# EAGLE board CT_schematic (EAGLE 7.6.0)

Size 100 x 80 mm. Coordinates in mm from the lower left corner, seen from the top.
Outline: 0,0 100,0 100,80 0,80 0,0
Copper layers (1*16): Top 0.035mm / dielectric 1.5mm / Bottom 0.035mm
Design rules "default": minimum track width 10mil, minimum drill 24mil, track to track 8mil, track to pad 8mil, pad to pad 8mil, via to via 8mil, smd to smd 8mil, copper to edge 40mil, drill to drill 8mil, minimum pad ring 10mil, minimum via ring 8mil, stop-mask expansion 4mil, vias tented up to drill 0mil, thermal gap 10mil

## Footprints (pad centres in the part's own frame; a part is rotated, then mirrored left to right if it is on the bottom)
C0603 = smd 0.8 x 0.8: 1 -0.762,0; 2 0.762,0
C0402 = smd 0.5 x 0.5: 1 -0.508,0; 2 0.508,0
C1210 = smd 1.2 x 2.5: 1 -1.524,0; 2 1.524,0
EXV-9H = smd 3.505 x 1.676: 1 -2.857,0; 2 2.857,0
L0603 = smd 0.8 x 0.8: 1 -0.762,0; 2 0.762,0
PJ-037B_PACKAGE = drill 3.7 square: 1 12,0 | drill 3.2 square: 2 6,0
R0603 = smd 0.8 x 0.8: 1 -0.762,0; 2 0.762,0
LQFP176 = smd 0.3 x 1.2: 1 -10.75,-12.75; 2 -10.25,-12.75; 3 -9.75,-12.75; 4 -9.25,-12.75; 5 -8.75,-12.75; 6 -8.25,-12.75; 7 -7.75,-12.75; 8 -7.25,-12.75; 9 -6.75,-12.75; 10 -6.25,-12.75; 11 -5.75,-12.75; 12 -5.25,-12.75; 13 -4.75,-12.75; 14 -4.25,-12.75; 15 -3.75,-12.75; 16 -3.25,-12.75; 17 -2.75,-12.75; 18 -2.25,-12.75; 19 -1.75,-12.75; 20 -1.25,-12.75; 21 -0.75,-12.75; 22 -0.25,-12.75; 23 0.25,-12.75; 24 0.75,-12.75; 25 1.25,-12.75; 26 1.75,-12.75; 27 2.25,-12.75; 28 2.75,-12.75; 29 3.25,-12.75; 30 3.75,-12.75; 31 4.25,-12.75; 32 4.75,-12.75; 33 5.25,-12.75; 34 5.75,-12.75; 35 6.25,-12.75; 36 6.75,-12.75; 37 7.25,-12.75; 38 7.75,-12.75; 39 8.25,-12.75; 40 8.75,-12.75; 41 9.25,-12.75; 42 9.75,-12.75; 43 10.25,-12.75; 44 10.75,-12.75; 89 10.75,12.75; 90 10.25,12.75; 91 9.75,12.75; 92 9.25,12.75; 93 8.75,12.75; 94 8.25,12.75; 95 7.75,12.75; 96 7.25,12.75; 97 6.75,12.75; 98 6.25,12.75; 99 5.75,12.75; 100 5.25,12.75; 101 4.75,12.75; 102 4.25,12.75; 103 3.75,12.75; 104 3.25,12.75; 105 2.75,12.75; 106 2.25,12.75; 107 1.75,12.75; 108 1.25,12.75; 109 0.75,12.75; 110 0.25,12.75; 111 -0.25,12.75; 112 -0.75,12.75; 113 -1.25,12.75; 114 -1.75,12.75; 115 -2.25,12.75; 116 -2.75,12.75; 117 -3.25,12.75; 118 -3.75,12.75; 119 -4.25,12.75; 120 -4.75,12.75; 121 -5.25,12.75; 122 -5.75,12.75; 123 -6.25,12.75; 124 -6.75,12.75; 125 -7.25,12.75; 126 -7.75,12.75; 127 -8.25,12.75; 128 -8.75,12.75; 129 -9.25,12.75; 130 -9.75,12.75; 131 -10.25,12.75; 132 -10.75,12.75 | smd 1.2 x 0.3: 45 12.75,-10.75; 46 12.75,-10.25; 47 12.75,-9.75; 48 12.75,-9.25; 49 12.75,-8.75; 50 12.75,-8.25; 51 12.75,-7.75; 52 12.75,-7.25; 53 12.75,-6.75; 54 12.75,-6.25; 55 12.75,-5.75; 56 12.75,-5.25; 57 12.75,-4.75; 58 12.75,-4.25; 59 12.75,-3.75; 60 12.75,-3.25; 61 12.75,-2.75; 62 12.75,-2.25; 63 12.75,-1.75; 64 12.75,-1.25; 65 12.75,-0.75; 66 12.75,-0.25; 67 12.75,0.25; 68 12.75,0.75; 69 12.75,1.25; 70 12.75,1.75; 71 12.75,2.25; 72 12.75,2.75; 73 12.75,3.25; 74 12.75,3.75; 75 12.75,4.25; 76 12.75,4.75; 77 12.75,5.25; 78 12.75,5.75; 79 12.75,6.25; 80 12.75,6.75; 81 12.75,7.25; 82 12.75,7.75; 83 12.75,8.25; 84 12.75,8.75; 85 12.75,9.25; 86 12.75,9.75; 87 12.75,10.25; 88 12.75,10.75; 133 -12.75,10.75; 134 -12.75,10.25; 135 -12.75,9.75; 136 -12.75,9.25; 137 -12.75,8.75; 138 -12.75,8.25; 139 -12.75,7.75; 140 -12.75,7.25; 141 -12.75,6.75; 142 -12.75,6.25; 143 -12.75,5.75; 144 -12.75,5.25; 145 -12.75,4.75; 146 -12.75,4.25; 147 -12.75,3.75; 148 -12.75,3.25; 149 -12.75,2.75; 150 -12.75,2.25; 151 -12.75,1.75; 152 -12.75,1.25; 153 -12.75,0.75; 154 -12.75,0.25; 155 -12.75,-0.25; 156 -12.75,-0.75; 157 -12.75,-1.25; 158 -12.75,-1.75; 159 -12.75,-2.25; 160 -12.75,-2.75; 161 -12.75,-3.25; 162 -12.75,-3.75; 163 -12.75,-4.25; 164 -12.75,-4.75; 165 -12.75,-5.25; 166 -12.75,-5.75; 167 -12.75,-6.25; 168 -12.75,-6.75; 169 -12.75,-7.25; 170 -12.75,-7.75; 171 -12.75,-8.25; 172 -12.75,-8.75; 173 -12.75,-9.25; 174 -12.75,-9.75; 175 -12.75,-10.25; 176 -12.75,-10.75
ARDUCAM = drill 1 pad 1.8 square: 1 0,0 | drill 1 pad 1.8: 2 0,2.54; 3 2.54,0; 4 2.54,2.54; 5 5.08,0; 6 5.08,2.54; 7 7.62,0; 8 7.62,2.54; 9 10.16,0; 10 10.16,2.54; 11 12.7,0; 12 12.7,2.54; 13 15.24,0; 14 15.24,2.54; 15 17.78,0; 16 17.78,2.54; 17 20.32,0; 18 20.32,2.54; 19 22.86,0; 20 22.86,2.54
AT24C02D = smd 1.6 x 0.6: 1 -2.475,1.905 | smd 1.55 x 0.6: 2 -2.475,0.635; 3 -2.475,-0.635; 4 -2.475,-1.905; 5 2.475,-1.905; 6 2.475,-0.635; 7 2.475,0.635; 8 2.475,1.905
TDFN-8/6MM = smd 0.3 x 0.75: 1 0,0; 2 0.5,0; 3 1,0; 4 1.5,0; 5 1.5,3; 6 1,3; 7 0.5,3; 8 0,3
PC28F512P33BFD = smd 0.45 x 0.45: A1 0,0; A2 1,0; A3 2,0; A4 3,0; A5 4,0; A6 5,0; A7 6,0; A8 7,0; B1 0,-1; B2 1,-1; B3 2,-1; B4 3,-1; B5 4,-1; B6 5,-1; B7 6,-1; B8 7,-1; C1 0,-2; C2 1,-2; C3 2,-2; C4 3,-2; C5 4,-2; C6 5,-2; C7 6,-2; C8 7,-2; D1 0,-3; D2 1,-3; D3 2,-3; D4 3,-3; D5 4,-3; D6 5,-3; D7 6,-3; D8 7,-3; E1 0,-4; E2 1,-4; E3 2,-4; E4 3,-4; E5 4,-4; E6 5,-4; E7 6,-4; E8 7,-4; F1 0,-5; F2 1,-5; F3 2,-5; F4 3,-5; F5 4,-5; F6 5,-5; F7 6,-5; F8 7,-5; G1 0,-6; G2 1,-6; G3 2,-6; G4 3,-6; G5 4,-6; G6 5,-6; G7 6,-6; G8 7,-6; H1 0,-7; H2 1,-7; H3 2,-7; H4 3,-7; H5 4,-7; H6 5,-7; H7 6,-7; H8 7,-7
ABS07-32.768KHZ-7-T = smd 1.1 x 2.4: 1 -2.5,0; 2 0,0
ASFL1 = smd 1.7 x 1.5: 1 -1.27,-1.1; 2 1.27,-1.1; 3 1.27,1.1; 4 -1.27,1.1
IDT74FCT38072 = smd 0.51 x 1: 1 0,0; 2 1.27,0; 3 2.54,0; 4 3.81,0; 5 3.81,4.95; 6 2.54,4.95; 7 1.27,4.95; 8 0,4.95
WSON-8 = smd 0.3 x 0.6: 1 -0.75,0; 2 0.05,0; 3 0.85,0; 4 1.65,0; 5 1.65,3.8; 6 0.85,3.8; 7 0.05,3.8; 8 -0.75,3.8 | smd 3 x 2.6: PAD 0.45,1.9
SON-6 = smd 0.55 x 0.3: 1 -0.355,0.5 | smd 0.52 x 0.3: 2 -0.37,0; 3 -0.37,-0.5; 4 0.37,-0.5; 5 0.37,0; 6 0.37,0.5
SW_4-1437565-2 = smd 1.4 x 2.1: 1 -2.23,4.55; 2 -2.23,-4.55; 3 2.23,4.55; 4 2.23,-4.55
LGM67K-G1J2-24-Z = smd 0.8 x 1.4: A -2,0; C 0,0
NC7SZ125M5X = smd 1.3 x 0.7: 1 -1.3,0.95; 2 -1.3,0; 3 -1.3,-0.95; 4 1.3,-0.95; 5 1.3,0.95

## Placement (x,y rotation side)
C1  1e-06  [C0603]  -50.8,72.39 0 top  (outside the outline)
C2  1e-07  [C0603]  -54.61,72.39 0 top  (outside the outline)
C3  1e-07  [C0603]  -58.42,72.39 0 top  (outside the outline)
C4  1e-07  [C0603]  -62.23,72.39 0 top  (outside the outline)
C5  1e-07  [C0603]  -66.04,72.39 0 top  (outside the outline)
C6  1e-07  [C0603]  -69.85,72.39 0 top  (outside the outline)
C7  1e-07  [C0603]  -73.66,72.39 0 top  (outside the outline)
C8  1e-07  [C0603]  -15.24,77.47 0 top  (outside the outline)
C9  1e-07  [C0603]  -19.05,77.47 0 top  (outside the outline)
C10  1e-07  [C0603]  -22.86,77.47 0 top  (outside the outline)
C11  1e-07  [C0603]  -26.67,77.47 0 top  (outside the outline)
C12  1e-07  [C0603]  -30.48,77.47 0 top  (outside the outline)
C13  1e-07  [C0603]  -34.29,77.47 0 top  (outside the outline)
C14  1e-07  [C0603]  -38.1,77.47 0 top  (outside the outline)
C15  1e-07  [C0603]  -41.91,77.47 0 top  (outside the outline)
C16  1e-07  [C0603]  -45.72,77.47 0 top  (outside the outline)
C17  1e-07  [C0603]  -49.53,77.47 0 top  (outside the outline)
C18  4.7e-06  [C0603]  -39.37,72.39 0 top  (outside the outline)
C19  2.2e-06  [C0603]  -43.18,72.39 0 top  (outside the outline)
C20  2.2e-06  [C0603]  -46.99,72.39 0 top  (outside the outline)
C21  1e-08  [C0603]  -53.34,77.47 0 top  (outside the outline)
C22  1e-06  [C0603]  -57.15,77.47 0 top  (outside the outline)
C23  1e-11  [C0402]  -45.72,82.55 0 top  (outside the outline)
C24  1e-11  [C0402]  -49.53,82.55 0 top  (outside the outline)
C25  1e-06  [C0603]  -60.96,77.47 0 top  (outside the outline)
C26  1e-08  [C0402]  -53.34,82.55 0 top  (outside the outline)
C27  1e-08  [C0402]  -57.15,82.55 0 top  (outside the outline)
C28  1e-07  [C0402]  -60.96,82.55 0 top  (outside the outline)
C29  1e-08  [C0402]  -64.77,82.55 0 top  (outside the outline)
C30  1e-07  [C0402]  -68.58,82.55 0 top  (outside the outline)
C31  1e-08  [C0402]  -72.39,82.55 0 top  (outside the outline)
C32  1e-07  [C0402]  -76.2,82.55 0 top  (outside the outline)
C33  1e-08  [C0402]  -15.24,87.63 0 top  (outside the outline)
C34  1e-08  [C0402]  -19.05,87.63 0 top  (outside the outline)
C35  1e-08  [C0402]  -22.86,87.63 0 top  (outside the outline)
C36  1e-08  [C0402]  -26.67,87.63 0 top  (outside the outline)
C37  1e-05  [C1210]  -59.69,60.96 0 top  (outside the outline)
C38  1e-05  [C1210]  -66.04,60.96 0 top  (outside the outline)
C39  1e-07  [C0402]  -30.48,87.63 0 top  (outside the outline)
C40  0.0001  [EXV-9H]  -17.78,53.34 0 top  (outside the outline)
C41  0.0001  [EXV-9H]  -29.21,53.34 0 top  (outside the outline)
C42  1e-08  [C0402]  -34.29,87.63 0 top  (outside the outline)
C43  1e-08  [C0402]  -38.1,87.63 0 top  (outside the outline)
C44  1e-08  [C0402]  -41.91,87.63 0 top  (outside the outline)
F1  240.0  [L0603]  -64.77,77.47 0 top  (outside the outline)
J1  PJ-037B  [PJ-037B_PACKAGE]  -54.61,7.62 0 top  (outside the outline)
R2  1000.0  [R0603]  -68.58,77.47 0 top  (outside the outline)
R4  4700.0  [R0603]  -72.39,77.47 0 top  (outside the outline)
R5  4700.0  [R0603]  -76.2,77.47 0 top  (outside the outline)
R6  4700.0  [R0603]  -15.24,82.55 0 top  (outside the outline)
R7  2200.0  [R0603]  -19.05,82.55 0 top  (outside the outline)
R8  2200.0  [R0603]  -22.86,82.55 0 top  (outside the outline)
R9  2200.0  [R0603]  -26.67,82.55 0 top  (outside the outline)
R10  2200.0  [R0603]  -30.48,82.55 0 top  (outside the outline)
R11  10000.0  [R0603]  -43.18,67.31 0 top  (outside the outline)
R12  10000.0  [R0603]  -48.26,67.31 0 top  (outside the outline)
R13  10000.0  [R0603]  -53.34,67.31 0 top  (outside the outline)
R14  10000.0  [R0603]  -58.42,67.31 0 top  (outside the outline)
R15  10000.0  [R0603]  -63.5,67.31 0 top  (outside the outline)
R16  10000.0  [R0603]  -68.58,67.31 0 top  (outside the outline)
R17  10000.0  [R0603]  -73.66,67.31 0 top  (outside the outline)
R18  10000.0  [R0603]  -15.24,72.39 0 top  (outside the outline)
R19  10000.0  [R0603]  -20.32,72.39 0 top  (outside the outline)
R20  10000.0  [R0603]  -25.4,72.39 0 top  (outside the outline)
R21  100000.0  [R0603]  -27.94,67.31 0 top  (outside the outline)
R22  2231.0  [R0603]  -34.29,82.55 0 top  (outside the outline)
R23  1000.0  [R0603]  -38.1,82.55 0 top  (outside the outline)
R24  10000.0  [R0603]  -30.48,72.39 0 top  (outside the outline)
R25  10000.0  [R0603]  -35.56,72.39 0 top  (outside the outline)
R26  9100.0  [R0603]  -41.91,82.55 0 top  (outside the outline)
R27  680000.0  [R0603]  -33.02,67.31 0 top  (outside the outline)
R28  120000.0  [R0603]  -38.1,67.31 0 top  (outside the outline)
U1  STM32F207IET6  [LQFP176]  -26.67,13.97 0 top  (outside the outline)
U2  arducam_ov2640  [ARDUCAM]  -40.64,58.42 0 top  (outside the outline)
U3  AT24C02D-SSHM-T  [AT24C02D]  -57.15,33.02 0 top  (outside the outline)
U4  24AA16-I/MC  [TDFN-8/6MM]  -41.91,31.75 0 top  (outside the outline)
U5  PC28F512P33BFD  [PC28F512P33BFD]  -71.12,10.16 0 top  (outside the outline)
U6  ABS07-32.768KHZ-7-T  [ABS07-32.768KHZ-7-T]  -50.8,53.34 0 top  (outside the outline)
U7  ASFL1-25MHZ-NCS  [ASFL1]  -46.99,44.45 0 top  (outside the outline)
U8  idt74fct38072  [IDT74FCT38072]  -67.31,41.91 0 top  (outside the outline)
U9  LP3878SDX-ADJ/NOPB  [WSON-8]  -30.48,43.18 0 top  (outside the outline)
U10  TPS3895ADRYR  [SON-6]  -44.45,86.36 0 top  (outside the outline)
U11  4-1437565-2  [SW_4-1437565-2]  -27.94,34.29 0 top  (outside the outline)
U12  Q65110A2395  [LGM67K-G1J2-24-Z]  -48.26,60.96 0 top  (outside the outline)
U13  nc7sz125m5x  [NC7SZ125M5X]  -71.12,59.69 0 top  (outside the outline)
U14  nc7sz125m5x  [NC7SZ125M5X]  -15.24,66.04 0 top  (outside the outline)
U15  nc7sz125m5x  [NC7SZ125M5X]  -21.59,66.04 0 top  (outside the outline)

## Library data of the parts
C1-C44 F1 J1 R2 R4-R28 U1-U15 = circuit_tree

## Nets
CLK_CRYSTAL_U1_9: C23.1 U1.9 U6.1
CLK_CRYSTAL_U1_10: C24.1 U1.10 U6.2
CLK_U1_29: U1.29 U8.6
CLK_U2_8: U2.8 U8.7
CLK_U8_3: U7.3 U8.3
GND: C1.2 C2.2 C3.2 C4.2 C5.2 C6.2 C7.2 C8.2 C9.2 C10.2 C11.2 C12.2 C13.2 C14.2 C15.2 C16.2 C17.2 C18.2 C19.2 C20.2 C21.2 C22.2 C23.2 C24.2 C25.2 C26.2 C27.2 C28.2 C29.2 C30.2 C31.2 C32.2 C33.2 C34.2 C35.2 C36.2 C37.2 C38.2 C39.2 C40.2 C41.2 C42.2 C43.2 C44.2 J1.2 R2.2 R11.2 R12.2 R14.2 R15.2 R23.2 R26.2 R28.2 U1.14 U1.22 U1.37 U1.48 U1.61 U1.71 U1.90 U1.102 U1.113 U1.126 U1.135 U1.148 U1.158 U2.2 U2.20 U3.4 U4.4 U4.7 U5.B2 U5.H2 U5.H4 U5.H6 U7.2 U8.4 U8.5 U8.8 U9.3 U9.PAD U10.2 U12.C U13.1 U13.3 U14.1 U14.3 U15.1 U15.3
NET_U1_31: R5.1 U1.31 U14.4
NET_U1_39: C21.1 C22.1 F1.1 U1.38 U1.39
NET_U1_45: R9.1 U1.45 U4.6
NET_U1_46: R10.1 U1.46 U4.5
NET_U1_81: C19.1 U1.81
NET_U1_125: C20.1 U1.125
NET_U1_164: R7.1 U1.164 U3.6
NET_U1_166: R11.1 U1.166
NET_U1_168: R8.1 U1.168 U3.5
NET_U1_170: U12.A
NET_U1_175: U11.3 U11.4
NET_U2_19: R6.1 U2.19 U15.4
NET_U3_1: R13.1 U3.1
NET_U3_2: R14.1 U3.2
NET_U3_3: R15.1 U3.3
NET_U3_7: R12.1 U3.7
NET_U5_A4: C32.1 C33.1 U5.A4
NET_U5_C6: R19.1 U5.C6
NET_U5_D4: R4.1 U5.D4 U13.4
NET_U9_1: C36.1 U9.1
NET_U9_6: R22.2 R23.1 U9.6
NET_U9_8: R21.1 U9.8
NET_U10_1: R25.1 R26.1 U10.1
NET_U10_3: R27.2 R28.1 U10.3
NET_U10_4: R24.1 U10.4 U13.2 U14.2 U15.2
NET_U11_1: R2.1 U11.1 U11.2
PROC_DCMI_D0: U1.86 U2.18
PROC_DCMI_D1: U1.87 U2.17
PROC_DCMI_D2: U1.88 U2.16
PROC_DCMI_D3: U1.89 U2.15
PROC_DCMI_D4: U1.129 U2.14
PROC_DCMI_D5: U1.173 U2.13
PROC_DCMI_D6: U1.167 U2.12
PROC_DCMI_D7: U1.176 U2.11
PROC_DCMI_D8: U1.132 U2.10
PROC_DCMI_D9: U1.133 U2.9
PROC_DCMI_HSYNC: U1.50 U2.6
PROC_DCMI_PIXCK: U1.52 U2.7
PROC_DCMI_VSYNC: U1.174 U2.5
PROC_FSMC_A0: U1.16 U5.A1
PROC_FSMC_A1: U1.17 U5.B1
PROC_FSMC_A2: U1.18 U5.C1
PROC_FSMC_A3: U1.19 U5.D1
PROC_FSMC_A4: U1.20 U5.D2
PROC_FSMC_A5: U1.21 U5.A2
PROC_FSMC_A6: U1.60 U5.C2
PROC_FSMC_A7: U1.63 U5.A3
PROC_FSMC_A8: U1.64 U5.B3
PROC_FSMC_A9: U1.65 U5.C3
PROC_FSMC_A10: U1.66 U5.D3
PROC_FSMC_A11: U1.67 U5.C4
PROC_FSMC_A12: U1.106 U5.A5
PROC_FSMC_A13: U1.107 U5.B5
PROC_FSMC_A14: U1.108 U5.C5
PROC_FSMC_A15: U1.109 U5.D7
PROC_FSMC_A16: U1.99 U5.D8
PROC_FSMC_A17: U1.100 U5.A7
PROC_FSMC_A18: U1.101 U5.B7
PROC_FSMC_A19: U5.C7
PROC_FSMC_A20: U5.C8
PROC_FSMC_A21: U5.A8
PROC_FSMC_A22: U5.G1
PROC_FSMC_A23: U5.H8
PROC_FSMC_A24: U5.B6
PROC_FSMC_CLK: U1.145 U5.E6
PROC_FSMC_D0: U5.F2
PROC_FSMC_D1: U5.E2
PROC_FSMC_D2: U5.G3
PROC_FSMC_D3: U5.E4
PROC_FSMC_D4: U5.E5
PROC_FSMC_D5: U5.G5
PROC_FSMC_D6: U5.G6
PROC_FSMC_D7: U5.H7
PROC_FSMC_D8: U5.E1
PROC_FSMC_D9: U5.E3
PROC_FSMC_D10: U5.F3
PROC_FSMC_D11: U5.F4
PROC_FSMC_D12: U5.F5
PROC_FSMC_D13: U5.H5
PROC_FSMC_D14: U5.G7
PROC_FSMC_D15: U5.E7
PROC_FSMC_NE4: R17.1 U5.B4
PROC_FSMC_NL: R16.1 U1.165 U5.F6
PROC_FSMC_NOE: R18.1 U1.146 U5.F8
PROC_FSMC_NWAIT: U1.150 U5.F7
PROC_FSMC_NWE: R20.1 U1.147 U5.G8
VCC_S1_13V7: C37.1 C40.1 C41.1 J1.1 R21.2 U9.4
VCC_TIER1_3V3: C1.1 C2.1 C3.1 C4.1 C5.1 C6.1 C7.1 C8.1 C9.1 C10.1 C11.1 C12.1 C13.1 C14.1 C15.1 C16.1 C17.1 C18.1 C25.1 C26.1 C27.1 C28.1 C29.1 C30.1 C31.1 C34.1 C35.1 C38.1 C39.1 C42.1 C43.1 C44.1 F1.2 R4.2 R5.2 R6.2 R7.2 R8.2 R9.2 R10.2 R13.2 R16.2 R17.2 R18.2 R19.2 R20.2 R22.1 R24.2 R25.2 R27.1 U1.6 U1.15 U1.23 U1.36 U1.49 U1.62 U1.72 U1.82 U1.91 U1.103 U1.114 U1.127 U1.136 U1.149 U1.159 U1.172 U2.1 U3.8 U4.8 U5.A6 U5.D5 U5.D6 U5.G4 U5.H3 U7.4 U8.1 U8.2 U9.5 U10.6 U13.5 U14.5 U15.5

## Tracks (layer width: path | path; a pad name or v marks a point on that pad's centre or on a via)
CLK_CRYSTAL_U1_9  (2 unrouted)
CLK_CRYSTAL_U1_10  (2 unrouted)
CLK_U1_29  (1 unrouted)
CLK_U2_8  (1 unrouted)
CLK_U8_3  (1 unrouted)
GND  (88 unrouted)
NET_U1_31  (2 unrouted)
NET_U1_39  (4 unrouted)
NET_U1_45  (2 unrouted)
NET_U1_46  (2 unrouted)
NET_U1_81  (1 unrouted)
NET_U1_125  (1 unrouted)
NET_U1_164  (2 unrouted)
NET_U1_166  (1 unrouted)
NET_U1_168  (2 unrouted)
NET_U1_175  (1 unrouted)
NET_U2_19  (2 unrouted)
NET_U3_1  (1 unrouted)
NET_U3_2  (1 unrouted)
NET_U3_3  (1 unrouted)
NET_U3_7  (1 unrouted)
NET_U5_A4  (2 unrouted)
NET_U5_C6  (1 unrouted)
NET_U5_D4  (2 unrouted)
NET_U9_1  (1 unrouted)
NET_U9_6  (2 unrouted)
NET_U9_8  (1 unrouted)
NET_U10_1  (2 unrouted)
NET_U10_3  (2 unrouted)
NET_U10_4  (4 unrouted)
NET_U11_1  (2 unrouted)
PROC_DCMI_D0  (1 unrouted)
PROC_DCMI_D1  (1 unrouted)
PROC_DCMI_D2  (1 unrouted)
PROC_DCMI_D3  (1 unrouted)
PROC_DCMI_D4  (1 unrouted)
PROC_DCMI_D5  (1 unrouted)
PROC_DCMI_D6  (1 unrouted)
PROC_DCMI_D7  (1 unrouted)
PROC_DCMI_D8  (1 unrouted)
PROC_DCMI_D9  (1 unrouted)
PROC_DCMI_HSYNC  (1 unrouted)
PROC_DCMI_PIXCK  (1 unrouted)
PROC_DCMI_VSYNC  (1 unrouted)
PROC_FSMC_A0  (1 unrouted)
PROC_FSMC_A1  (1 unrouted)
PROC_FSMC_A2  (1 unrouted)
PROC_FSMC_A3  (1 unrouted)
PROC_FSMC_A4  (1 unrouted)
PROC_FSMC_A5  (1 unrouted)
PROC_FSMC_A6  (1 unrouted)
PROC_FSMC_A7  (1 unrouted)
PROC_FSMC_A8  (1 unrouted)
PROC_FSMC_A9  (1 unrouted)
PROC_FSMC_A10  (1 unrouted)
PROC_FSMC_A11  (1 unrouted)
PROC_FSMC_A12  (1 unrouted)
PROC_FSMC_A13  (1 unrouted)
PROC_FSMC_A14  (1 unrouted)
PROC_FSMC_A15  (1 unrouted)
PROC_FSMC_A16  (1 unrouted)
PROC_FSMC_A17  (1 unrouted)
PROC_FSMC_A18  (1 unrouted)
PROC_FSMC_CLK  (1 unrouted)
PROC_FSMC_NE4  (1 unrouted)
PROC_FSMC_NL  (2 unrouted)
PROC_FSMC_NOE  (2 unrouted)
PROC_FSMC_NWAIT  (1 unrouted)
PROC_FSMC_NWE  (2 unrouted)
VCC_S1_13V7  (5 unrouted)
VCC_TIER1_3V3  (81 unrouted)